# EAGLE board 4Bit Computer - 4 Bit Adder - With XOR AND  OR (EAGLE 7.6.0)

Size 38 x 48 mm. Coordinates in mm from the lower left corner, seen from the top.
Outline: 0,0 38,0 38,48 0,48 0,0
Copper layers (1*16): Top 0.035mm / dielectric 1.5mm / Bottom 0.035mm
Design rules "default": minimum track width 10mil, minimum drill 24mil, track to track 8mil, track to pad 8mil, pad to pad 8mil, via to via 8mil, smd to smd 8mil, copper to edge 40mil, drill to drill 8mil, minimum pad ring 10mil, minimum via ring 8mil, stop-mask expansion 4mil, vias tented up to drill 0mil, thermal gap 10mil

## Footprints (pad centres in the part's own frame; a part is rotated, then mirrored left to right if it is on the bottom)
DIL14 = drill 0.813 long: 1 -7.62,-3.81; 2 -5.08,-3.81; 3 -2.54,-3.81; 4 0,-3.81; 5 2.54,-3.81; 6 5.08,-3.81; 7 7.62,-3.81; 8 7.62,3.81; 9 5.08,3.81; 10 2.54,3.81; 11 0,3.81; 12 -2.54,3.81; 13 -5.08,3.81; 14 -7.62,3.81
1X10-BIG = drill 1.016 pad 1.778 octagon: 1 -11.43,0; 2 -8.89,0; 3 -6.35,0; 4 -3.81,0; 5 -1.27,0; 6 1.27,0; 7 3.81,0; 8 6.35,0; 9 8.89,0; 10 11.43,0

## Placement (x,y rotation side)
74LS08N_AND_1  74LS08N  [DIL14]  28.1,12.5 180 top
74LS08N_AND_2  74LS08N  [DIL14]  9.5,37 180 top
74LS32_OR_1  74LS32N  [DIL14]  28,24.5 180 top
74LS86N_XOR_1  74LS86N  [DIL14]  9.5,12.5 180 top
74LS86N_XOR_2  74LS86N  [DIL14]  9.5,24.5 180 top
BITS_IN  PINHD-1X10  [1X10-BIG]  20,2 180 top
BITS_OUT  PINHD-1X10  [1X10-BIG]  19,46 180 top

## Library data of the parts
74LS08N_AND_1 74LS08N_AND_2 74LS32_OR_1 74LS86N_XOR_1 74LS86N_XOR_2 = 74xx-eu
BITS_IN BITS_OUT = adafruit

## Nets
B0_IN_0: 74LS08N_AND_1.1 74LS86N_XOR_1.1 BITS_IN.4
B0_IN_1: 74LS08N_AND_1.2 74LS08N_AND_1.4 74LS86N_XOR_1.2 74LS86N_XOR_1.4 BITS_IN.3
B0_IN_2: 74LS08N_AND_1.9 74LS86N_XOR_1.9 BITS_IN.2
B0_IN_3: 74LS08N_AND_1.12 74LS86N_XOR_1.12 BITS_IN.1
B1_IN_0: BITS_IN.8
B1_IN_1: 74LS08N_AND_1.5 74LS86N_XOR_1.5 BITS_IN.7
B1_IN_2: 74LS08N_AND_1.10 74LS86N_XOR_1.10 BITS_IN.6
B1_IN_3: 74LS08N_AND_1.13 74LS86N_XOR_1.13 BITS_IN.5
BIT_OUT_0: 74LS86N_XOR_2.3 BITS_OUT.5
BIT_OUT_1: 74LS86N_XOR_2.6 BITS_OUT.4
BIT_OUT_2: 74LS86N_XOR_2.8 BITS_OUT.3
BIT_OUT_3: 74LS86N_XOR_2.11 BITS_OUT.2
CARRY_IN_0: 74LS08N_AND_2.2 74LS86N_XOR_2.2
CARRY_OUT_1: 74LS08N_AND_2.5 74LS32_OR_1.3 74LS86N_XOR_2.5
CARRY_OUT_2: 74LS08N_AND_2.10 74LS32_OR_1.6 74LS86N_XOR_2.10
CARRY_OUT_3: 74LS08N_AND_2.13 74LS32_OR_1.8 74LS86N_XOR_2.13
CARRY_OUT_4: 74LS32_OR_1.11 BITS_OUT.1
GND: 74LS08N_AND_1.7 74LS08N_AND_2.7 74LS32_OR_1.7 74LS86N_XOR_1.7 74LS86N_XOR_2.7 BITS_IN.10 BITS_OUT.10
N$1: 74LS08N_AND_2.1 74LS86N_XOR_1.3 74LS86N_XOR_2.1
N$2: 74LS08N_AND_2.4 74LS86N_XOR_1.6 74LS86N_XOR_2.4
N$3: 74LS08N_AND_2.9 74LS86N_XOR_1.8 74LS86N_XOR_2.9
N$4: 74LS08N_AND_2.12 74LS86N_XOR_1.11 74LS86N_XOR_2.12
N$10: 74LS08N_AND_2.3 74LS32_OR_1.1
N$11: 74LS08N_AND_1.3 74LS32_OR_1.2
N$12: 74LS08N_AND_2.6 74LS32_OR_1.4
N$13: 74LS08N_AND_1.6 74LS32_OR_1.5
N$14: 74LS08N_AND_2.8 74LS32_OR_1.9
N$15: 74LS08N_AND_1.8 74LS32_OR_1.10
N$16: 74LS08N_AND_1.11 74LS32_OR_1.13
N$17: 74LS08N_AND_2.11 74LS32_OR_1.12
VCC: 74LS08N_AND_1.14 74LS08N_AND_2.14 74LS32_OR_1.14 74LS86N_XOR_1.14 74LS86N_XOR_2.14 BITS_IN.9 BITS_OUT.9

## Tracks (layer width: path | path; a pad name or v marks a point on that pad's centre or on a via)
B0_IN_0  (2 unrouted)
B0_IN_1  (4 unrouted)
B0_IN_2  (2 unrouted)
B0_IN_3  (2 unrouted)
B1_IN_1  (2 unrouted)
B1_IN_2  (2 unrouted)
B1_IN_3  (2 unrouted)
BIT_OUT_0  (1 unrouted)
BIT_OUT_1  (1 unrouted)
BIT_OUT_2  (1 unrouted)
BIT_OUT_3  (1 unrouted)
CARRY_IN_0  (1 unrouted)
CARRY_OUT_1  (2 unrouted)
CARRY_OUT_2  (2 unrouted)
CARRY_OUT_3  (2 unrouted)
CARRY_OUT_4  (1 unrouted)
GND  (6 unrouted)
N$1  (2 unrouted)
N$2  (2 unrouted)
N$3  (2 unrouted)
N$4  (2 unrouted)
N$10  (1 unrouted)
N$11  (1 unrouted)
N$12  (1 unrouted)
N$13  (1 unrouted)
N$14  (1 unrouted)
N$15  (1 unrouted)
N$16  (1 unrouted)
N$17  (1 unrouted)
VCC  (6 unrouted)

## Text on the board
tNames: GND | VCC | B0 | B1 | B2 | B3 | C3 | 4 Bit Adder | GND | GND | VCC | 0 | NIB_1 | 1 | 2 | 3 | 0 | NIB_0 | 1 | 2 | 3
bNames: MadeInTheUSB.net | PCBv1 - 2017.06